# Altium PCB cyberlamp.PcbDoc (part 2 of 2)
Units mm, origin at the board's own origin, x right, y up, seen from the top; angles counter-clockwise.
Board outline 100 x 80 mm, 2 copper layers (Top Layer, Bottom Layer), stack 1.371 mm thick; 155 components, 110 nets, 527 pads, 165 vias.
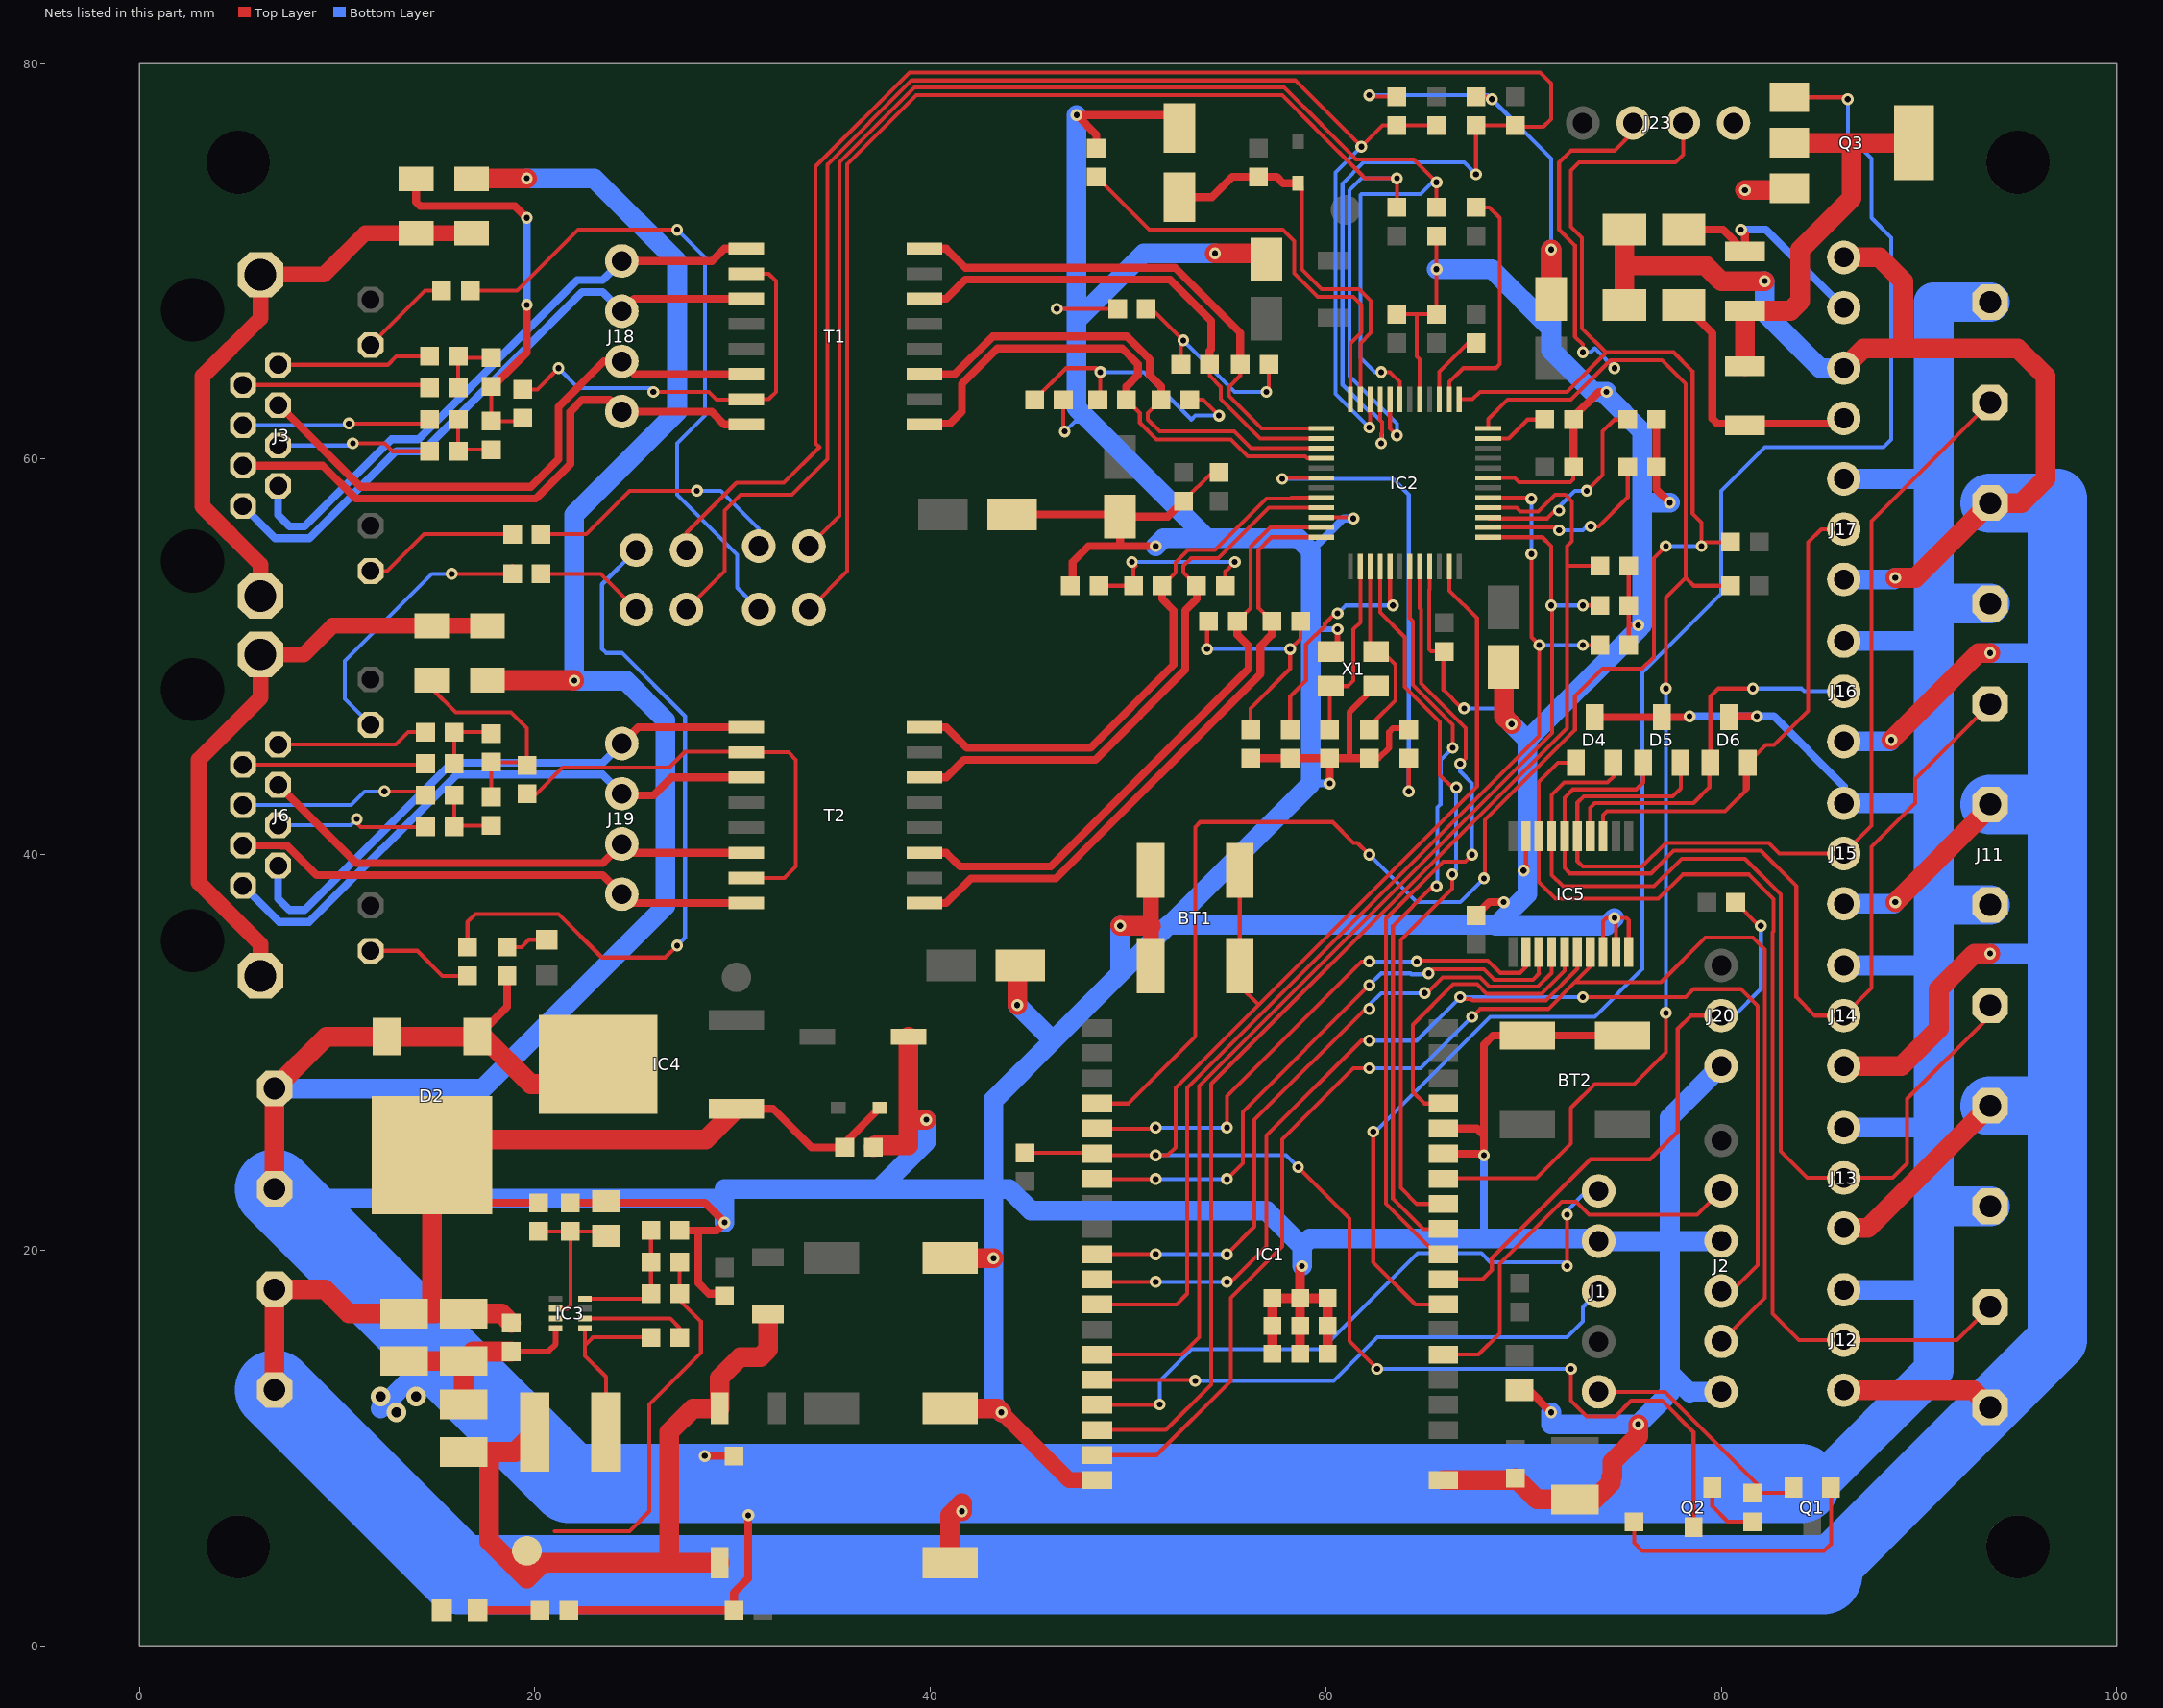
[diagram p2: the nets of this part, all layers, seen from the top]

## Via types
v1: diameter 0.6, hole 0.3, Top Layer to Bottom Layer, 162 vias
v2: diameter 1, hole 0.5, Top Layer to Bottom Layer, 3 vias

## Nets (pads, with @x,y where several pads share a name; then routed paths per layer and width w, separated by ;. In a path a pad name is that pad's centre, name@x,y a point inside that pad or via, vN(x,y) a via of type N, cw(c..) or ccw(c..) an arc to the next point about the centre after c; other vN are vias at no path point) (continued)
GND: BT1.3 BT1.4 BT2.1 BT2.2 C1.2 C2.2 C3.2 C4.2 C5.- C6.2 C7.2 C8.- C9.2 C10.- C11.2 C12.2 C13.- C14.2 C15.1 C16.1 C17.- C18.2 C19.2 C20.- C22.1 C23.2 C24.2 C25.- C27.1 C28.- C29.2 C31.- C32.2 C33.2 C34.2 C36.2 C37.2 C38.- C39.2 C40.2 C41.1 C42.2 D2.2 D4.3 D5.3 D6.3 IC1.1 IC1.14 IC1.15 IC1.38 IC1.39 IC2.10 IC2.21 IC2.31 IC2.41 IC3.4 IC4.3 IC5.8 IC5.9 IC5.10 IC5.19 J1.2 J2.3 J2.6 J10.1 J10.2 J11.3 J11.6 J11.9 J11.12 J12.1 J13.1 J14.1 J15.1 J16.1 J17.1 J20.3 J23.4 Q3.3 R2.1 R4.1 R5.1 R6.1 R9.1 R10.1 R11.1 R12.1 R20.1 R21.1 R23.2 R38.2 R52.1 R55.1 R56.1 R57.1 X1.2 X1.4 | length 843.3
  Top Layer w0.2: v1(46.4,67.6) C19.2@49.475,67.6 ; C18.2@46.725,63 46.725,61.475 v1(46.8,61.4) ; C9.2@52.8,57.875 54.25,59.325 C14.2@54.6,59.325 ; IC2.10@59.775,57.05 61.35,57.05 v1(61.4,57) ; v1(62.2,78.4) 62.275,78.325 R4.1@63.6,78.325 ; C12.2@63.6,67.325 C6.2@65.6,67.325 v1(65.6,69.6) R6.1@65.6,71.275 ; 64.6,67.2 64.6,65.2 64.75,65.05 IC2.41@64.75,63.025 ; IC2.21@65.25,54.575 65.25,53.425 65.225,53.4 65.225,50.375 65.325,50.275 C7.2@66,50.275 65.95,50.225 65.95,48.331 66.881,47.4 v1(67,47.4) ; R2.1@67.6,78.325 68.275,78.325 v1(68.4,78.2) ; IC2.31@68.225,59.05 69.55,59.05 69.775,58.825 72.375,58.825 72.525,58.975 C11.2@72.525,59.6 ; v1(70,39.2) 70.2,39.4 70.125,39.475 IC5.19@70.125,40.925 ; IC5.8@74.025,35.075 74.025,36.625 74.2,36.8 v1(74.6,36.8) ; IC5.9@74.675,35.075 74.675,36.725 v1(74.6,36.8) ; IC5.10@75.325,35.075 75.325,36.675 75.2,36.8 v1(74.6,36.8) ; R9.1@75.325,50.6 75.325,51.6 ; R10.1@75.325,54.6 R5.1@75.325,52.6 75.325,51.6 ; v1(75.8,51.6) 75.325,51.6
  Top Layer w0.3: C34.2@18.8,14.875 20.675,14.875 21.06,15.26 IC3.4@21.06,16.05 ; X1.2@60.25,50.275 60.6,50.625 v1(60.6,51.4) ; 61.2,44.875 61.2,47.2 62.525,48.525 X1.4@62.55,48.525 ; C15.1@62.2,44.875 62.675,44.875 63.2,45.4 63.2,46.2 63.4,46.4 64.125,46.4 R20.1@64.2,46.325
  Top Layer w0.4: D2.2@17.09,30.8 18.6,32.31 R56.1@18.6,33.875 ; R57.1@21.725,1.8 C39.2@30.075,1.8 30.075,2.675 30.8,3.4 v1(30.8,6.6) ; R55.1@21.8,22.4 28.6,22.4 v1(29.6,21.4) 29.2,21 28.262,21 ; R52.1@27.325,21 28.262,21 ; v1(28.6,9.6) C29.2@30.075,9.6 ; C37.2@29.6,17.675 29.475,17.8 28.8,17.8 28.262,18.338 28.262,21 ; C20.-@44.15,57.2 49.9,57.2 C8.-@50,57.1 ; C24.2@47.075,53.6 47.2,53.725 47.2,54.8 48,55.6 49.6,55.6 ; R23.2@48.4,75.725 48.4,76.4 v1(47.4,77.4) 51.95,77.4 C17.-@52.6,76.75 ; v1(51.4,55.6) 49.6,55.6 ; C9.2@52.8,57.875 52.025,57.1 C8.-@50,57.1 ; C23.2@56.2,44.875 C16.1@60.2,44.875 ; v1(60.2,43.6) C16.1@60.2,44.875 ; C15.1@62.2,44.875 61.2,44.875 C16.1@60.2,44.875 ; IC1.14@65.95,24.88 67.92,24.88 v1(68,24.8) 68,25.8 ; IC1.15@65.95,26.15 67.65,26.15 68,25.8 ; C42.2@67.6,36.925 68.275,37.6 v1(69,37.6) ; C3.2@69.8,12.925 70.275,12.925 v1(71.4,11.8) ; C11.2@72.525,59.6 R21.1@72.525,62 72.525,62.125 73.8,63.4 v1(74.2,63.4) ; D4.3@73.6,46.95 D5.3@77,46.95 78.35,46.95 v1(78.4,47) ; BT2.1@75.007,30.85 BT2.2@70.192,30.85 68.45,30.85 68,30.4 68,25.8 ; R11.1@76.725,62 R12.1@76.725,59.6 76.725,58.475 v1(77.4,57.8) ; D6.3@80.4,46.95 80.45,47 v1(81.8,47) ; 49.6,55.6 C8.-@49.6,57.1 C8.-@50,57.1
  Top Layer w0.5: IC1.39@57.3,14.77 IC1.39@57.3,16.17 IC1.39@57.3,17.57 IC1.39@58.7,17.57 ; IC1.39@58.7,14.77 IC1.39@58.7,16.17 IC1.39@58.7,17.57 ; v1(58.8,19.2) 58.7,19.1 IC1.39@58.7,17.57 ; IC1.39@60.1,14.77 IC1.39@60.1,16.17 IC1.39@60.1,17.57 IC1.39@58.7,17.57
  Top Layer w0.8: v1(43.6,11.8) 47.03,8.37 IC1.38@48.45,8.37 ; BT1.3@51.15,34.393 51.15,36.4 BT1.4@51.15,39.208
  Top Layer w1: J10.2@6.84,23.1 J10.1@6.84,28.18 9.46,30.8 D2.2@12.51,30.8 D2.2@17.09,30.8 17.4,30.8 19.8,28.4 IC4.3@23.2,28.4 ; C32.2@13.4,14.4 C33.2@16.4,14.4 ; C36.2@16.4,12.2 C33.2@16.4,14.4 ; C22.1@16.8,74.175 16.825,74.2 v1(19.6,74.2) ; C27.1@17.6,48.825 21.975,48.825 v1(22,48.8) ; C34.2@18.8,14.875 16.875,14.875 C33.2@16.4,14.4 ; C41.1@37.125,25.2 37.225,25.3 38.9,25.3 38.9,26.8 ; C40.2@38.9,30.8 38.9,26.8 ; v1(39.8,26.6) 39.1,26.6 38.9,26.8 ; C38.-@41,4.2 41,6.6 41.6,7.2 v1(41.6,6.8) ; C28.-@41,12 43.4,12 v1(43.6,11.8) ; C31.-@41,19.6 v1(43.2,19.6) ; v1(44.4,32.4) 44.4,34.25 C25.-@44.55,34.4 ; v1(49.6,36.4) 51.15,36.4 ; v1(54.4,70.4) 56.7,70.4 C13.-@57,70.1 ; IC1.1@65.95,8.37 69.495,8.37 C2.2@69.6,8.475 70.675,7.4 C1.2@72.6,7.4 73.6,7.4 74.425,8.225 74.425,8.49 74.5,8.565 74.5,9.3 75.8,10.6 v1(75.8,11.2) ; C5.-@69,49.5 69,47 v1(69.4,46.6) ; C10.-@71.4,68.1 v1(71.4,70.6) ; v1(81.2,73.6) 83.35,73.6 Q3.3@83.45,73.7
  Bottom Layer w0.2: v1(46.4,67.6) 47.4,67.6 ; v1(46.8,61.4) 47.3,61.9 48.1,61.9 ; v1(62.2,78.4) 68.2,78.4 v1(68.4,78.2) 71.4,75.2 v1(71.4,70.6) ; v1(67,47.4) 68.6,47.4 v1(69.4,46.6)
  Bottom Layer w0.3: 59.45,51.4 v1(60.6,51.4)
  Bottom Layer w0.4: 59.2,43.6 v1(60.2,43.6) ; 59.25,55.35 60.9,57 v1(61.4,57) ; 68,20.6 v1(68,24.8) ; v1(78.4,47) v1(81.8,47) 82.661,47 86.2,43.461 J15.1@86.2,42.6
  Bottom Layer w1: J10.2@6.84,23.1 7.34,22.6 29.6,22.6 v1(29.6,21.4) ; J10.1@6.84,28.18 17.38,28.18 26.6,37.4 26.6,46.8 24.6,48.8 v1(22,48.8) 22,57.2 27.2,62.4 27.2,70 23,74.2 v1(19.6,74.2) ; 12.2,12 14.97,14.77 14.97,14.97 ; 29.6,23.1 37.4,23.1 ; v1(39.8,26.6) 39.8,25.5 37.4,23.1 ; v1(43.6,11.8) 43.2,12.2 v1(43.2,19.6) 43.2,23.1 ; v1(44.4,32.4) 46.1,30.7 46.3,30.7 ; v1(47.4,77.4) 47.4,67.6 47.4,67 ; v1(49.6,36.4) 49.6,34 ; v1(51.4,55.6) 51.8,56 54,56 ; v1(54.4,70.4) 50.8,70.4 47.4,67 ; v1(58.8,19.2) 58.8,20.2 ; 59.25,51.2 59.25,43.65 59.2,43.6 59.2,43.537 52.063,36.4 52,36.4 ; 59.25,51.4 59.25,55.35 58.6,56 54,56 ; v1(65.6,69.6) 68.4,69.6 71.4,66.6 ; v1(69.4,46.6) 70.2,45.8 ; v1(71.4,11.8) 71.4,11.2 73.8,11.2 v1(75.8,11.2) 77.4,12.8 77.4,13.8 ; v1(71.4,70.6) 71.4,66.6 ; v1(74.6,36.8) 74.2,36.4 68.6,36.4 ; v1@75.9,51.5 70.2,45.8 ; v1@76,51.6 76,57.8 ; v1(77.4,57.8) 76,57.8 ; J2.6@80,12.85 78.45,12.85 78.4,12.8 77.4,13.8 ; J2.3@80,20.47 79.99,20.46 77.4,20.46 ; J20.3@80,29.32 77.4,26.72 77.4,20.46 ; J12.1@86.2,18 90.74,18 ; J13.1@86.2,26.2 90.74,26.2 ; J14.1@86.2,34.4 90.74,34.4 ; J15.1@86.2,42.6 90.74,42.6 ; J16.1@86.2,50.8 90.54,50.8 90.74,50.6 ; J17.1@86.2,59 90.54,59 90.74,59.2 ; 37.4,23.1 43.2,23.1 ; 43.2,23.1 44,23.1 45.1,22 57,22 58.8,20.2 ; 43.2,23.1 43.2,27.6 46.3,30.7 ; 46.3,30.7 49.6,34 ; 47.4,67 47.4,62.6 48.1,61.9 54,56 ; 49.6,34 52,36.4 ; 52,36.4 52.05,36.45 68.55,36.45 68.6,36.4 ; 58.8,20.2 59.2,20.6 68,20.6 73.66,20.6 J1.2@73.8,20.46 77.4,20.46 ; 68.6,36.4 70.2,38 70.2,45.8 ; 71.4,66.6 71.4,65.515 73.515,63.4 v1(74.2,63.4) 74.2,63.2 76,61.4 76,57.8 ; 77.4,13.8 77.4,20.46
  Bottom Layer w2: 85,8.2 90.74,13.94 90.74,18 90.74,22.22 ; J11.3@93.6,22.22 90.74,22.22 ; J11.6@93.6,37.46 90.74,37.46 ; J11.9@93.6,52.7 90.74,52.7 ; J11.12@93.6,67.94 90.74,67.94 90.74,59.2 90.74,52.7 ; 90.74,22.22 90.74,26.2 90.74,34.4 90.74,37.46 ; 90.74,37.46 90.74,42.6 90.74,50.6 90.74,52.7
  Bottom Layer w4: J10.2@6.84,23.1 14.97,14.97 21.74,8.2 84,8.2
  other v2: 13,11.8 12.2,12.6 14,12.6
NetBT1_1: BT1.1 BT1.2 IC1.25 IC2.23 Q2.3 R13.1 | length 94.3
  Top Layer w0.2: R13.1@44.8,24.925 48.405,24.925 IC1.25@48.45,24.88 48.53,24.8 v1(51.4,24.8) 52,24.8 52.4,25.2 52.4,28.2 56.6,32.4 ; BT1.2@55.65,39.208 BT1.1@55.65,34.393 55.65,33.35 56.6,32.4 ; v1(58.6,24.2) 61.2,21.6 61.2,15.4 v1(62.6,14) ; IC2.23@66.25,54.575 66.25,53.35 67.65,51.95 67.65,43.45 56.6,32.4 ; v1(72.4,14) 72.4,12.4 73.2,11.6 74.644,11.6 75.444,12.4 77,12.4 78.6,10.8 Q2.3@78.6,6
  Bottom Layer w0.2: v1(51.4,24.8) 58,24.8 v1(58.6,24.2) ; v1(62.6,14) v1(72.4,14)
NetC4_1: C4.1 IC3.2 R54.1 R55.2 | length 8.1
  Top Layer w0.2: R54.1@20.2,20.95 23.3,20.95 C4.1@23.6,20.65 ; IC3.2@21.06,17.05 21.65,17.05 21.8,17.2 R55.2@21.8,20.95
NetC15_2: C15.2 IC2.15 X1.1 | length 8.9
  Top Layer w0.2: IC2.15@62.25,54.575 62.25,50.575 X1.1@62.55,50.275 62.85,50.275 63.525,49.6 63.525,47.8 C15.2@62.525,46.8
NetC16_2: C16.2 IC2.14 X1.3 | length 9.4
  Top Layer w0.2: C16.2@60.2,46.325 60.2,48.475 X1.3@60.25,48.525 61.125,48.525 61.4,48.8 61.4,51.4 61.75,51.75 IC2.14@61.75,54.575
NetC17_+: C17.+ D1.2 IC2.47 R22.1 | length 20.3
  Top Layer w0.2: D1.2@58.6,73.945 58.8,73.745 58.8,69.6 59.8,68.6 61.695,68.6 62.275,68.02 62.275,66.38 61.75,65.855 IC2.47@61.75,63.025
  Top Layer w0.4: C17.+@52.6,73.25 54.25,73.25 55.275,74.275 R22.1@56.6,74.275 57.525,74.275 57.855,73.945 D1.2@58.6,73.945
NetC18_1: C18.1 R24.1 R25.1 | length 14.4
  Top Layer w0.2: C18.1@45.275,63 46.875,64.6 48.4,64.6 v1(48.6,64.4) 48.6,63.125 R24.1@48.475,63 ; R25.1@53.125,63 53.8,63 v1(54.6,62.2)
  Bottom Layer w0.2: v1(48.6,64.4) 50.8,64.4 53.2,62 53.4,62.2 v1(54.6,62.2)
NetC19_1: C19.1 R26.1 R31.1 | length 10.5
  Top Layer w0.2: C19.1@50.925,67.6 51.2,67.6 v1(52.8,66) 52.675,65.875 R26.1@52.675,64.8 ; v1(57,63.4) 57.125,63.525 R31.1@57.125,64.8
  Bottom Layer w0.2: v1(52.8,66) 55.4,63.4 v1(57,63.4)
NetC21_1: C21.1 C22.2 J3.13 | length 29.8
  Top Layer w0.8: J3.13@6.13,53.075 6.13,54.67 3.2,57.6 3.2,64.2 6.13,67.13 J3.13@6.13,69.325 9.325,69.325 11.425,71.425 C22.2@16.4,71.425
NetC21_2: C21.2 R27.2 R29.1 R33.1 | length 19.8
  Top Layer w0.2: R33.1@17.8,63.675 R29.1@17.8,61.925 19.25,61.925 R27.2@19.4,62.075
  Top Layer w0.4: C21.2@14,74.175 14,73 14.2,72.8 19,72.8 v1(19.6,72.2) ; R33.1@17.8,63.675 17.866,63.675 19.591,65.4 19.6,65.4 v1(19.6,67.8)
  Bottom Layer w0.4: v1(19.6,67.8) v1(19.6,72.2)
NetC23_1: C23.1 R37.1 R39.1 | length 12.2
  Top Layer w0.2: v1(54,50.4) 54,51.725 R39.1@54.075,51.8 ; C23.1@56.2,46.325 56.2,47.4 58.2,49.4 v1(58.2,50.4) 58.725,50.925 R37.1@58.725,51.8
  Bottom Layer w0.2: v1(54,50.4) v1(58.2,50.4)
NetC24_1: C24.1 R40.1 R45.1 | length 9.7
  Top Layer w0.2: C24.1@48.525,53.6 R45.1@50.275,53.6 50.275,54.475 50.4,54.6 v1(50.2,54.8) ; R40.1@54.925,53.6 54.925,54.325 v1(55.4,54.8)
  Bottom Layer w0.2: v1(50.2,54.8) v1(55.4,54.8)
NetC26_1: C26.1 C27.2 J6.13 | length 30.9
  Top Layer w0.8: J6.13@6.13,33.875 6.13,35.47 3,38.6 3,44.8 6.13,47.93 J6.13@6.13,50.125 8.325,50.125 9.775,51.575 C27.2@17.6,51.575
NetC26_2: C26.2 R41.2 R43.1 R47.1 | length 11.5
  Top Layer w0.2: C26.2@14.8,48.825 14.8,48.4 16,47.2 18.8,47.2 19.6,46.4 R41.2@19.6,44.525 19.45,44.675 R47.1@17.8,44.675 R43.1@17.8,42.925
NetC30_1: C30.1 IC3.6 | length 5.5
  Top Layer w0.2: IC3.6@22.54,16.55 26.85,16.55 27.325,16.075 C30.1@27.325,15.6
NetC30_2: C30.2 IC3.5 L1.1 | length 9.2
  Top Layer w0.2: IC3.5@22.54,16.05 22.54,15.2 ; L1.1@23.6,10.8 23.6,13.6 22.54,14.66 22.54,15.2 ; C30.2@25.875,15.6 22.94,15.6 22.54,15.2
NetC35_1: C35.1 C36.1 D8.2 FB2.1 FB3.1 FB4.1 L1.2 R51.2 TP2.1 | length 55.3
  Top Layer w0.2: 21,5.8 24.8,5.8 25.8,6.8 25.8,12.2 28.4,14.8 28.4,16.4 27.325,17.475 R51.2@27.325,17.8 C35.1@27.325,19.4
  Top Layer w1: L1.2@20,10.8 19,9.8 17.7,9.8 17.7,5.3 19.6,3.4 20.4,4.2 26.8,4.2 ; FB4.1@29.35,4.2 26.8,4.2 ; FB3.1@31.8,16.75 31.8,15 31.4,14.6 30.4,14.6 29.35,13.55 FB2.1@29.35,12 28,12 26.8,10.8 26.8,4.2
NetC35_2: C35.2 IC3.8 R51.1 R52.2 | length 6.6
  Top Layer w0.2: IC3.8@22.54,17.55 25.625,17.55 R51.1@25.875,17.8 R52.2@25.875,21
NetC43_-: C43.- J22.2 L3.2 | length 11.6
  Top Layer w0.4: C43.-@78.1,71.6 80.1,71.6 L3.2@81.2,70.5 81.2,71.4 v1(81,71.6)
  Bottom Layer w0.4: v1(81,71.6) 82.26,71.6 J22.2@86.2,67.66
NetC44_-: C44.- J21.2 L2.2 | length 13.4
  Top Layer w0.4: C44.-@78.1,67.8 79.55,66.35 79.55,62.05 79.8,61.8 L2.2@81.1,61.8 ; L2.2@81.2,61.7 L2.2@81.1,61.8 ; J21.2@86.2,62.06 85.94,61.8 L2.2@81.1,61.8
NetD4_1: D4.1 IC5.18 J11.2 J12.2 | length 53.8
  Top Layer w0.2: D4.1@72.65,44.65 71.745,44.65 70.775,43.68 IC5.18@70.775,40.925 70.775,38.625 71.625,37.775 76.825,37.775 78.05,39 81.4,39 82.65,37.75 82.65,36.131 82.6,36.081 82.6,16.8 83.94,15.46 J12.2@86.2,15.46 91.92,15.46 J11.2@93.6,17.14
NetD4_2: D4.2 IC5.17 J11.5 J13.2 | length 51.4
  Top Layer w0.2: D4.2@74.55,44.65 74.55,43.95 74.25,43.65 72.05,43.65 71.425,43.025 IC5.17@71.425,40.925 71.425,38.975 72,38.4 76.6,38.4 78,39.8 81.2,39.8 83,38 83,25 84.34,23.66 J13.2@86.2,23.66 88.66,23.66 89.4,24.4 89.4,27.66 93.6,31.86 J11.5@93.6,32.38
NetD5_1: D5.1 IC5.16 J11.8 J14.2 | length 49.1
  Top Layer w0.2: D5.1@76.05,44.65 76.05,43.65 75.7,43.3 72.5,43.3 72.075,42.875 IC5.16@72.075,40.925 72.075,39.325 72.35,39.05 76.45,39.05 77.6,40.2 82,40.2 83.8,38.4 83.8,32.8 84.74,31.86 J14.2@86.2,31.86 87.6,33.26 87.6,40.4 89.8,42.6 89.8,43.82 J11.8@93.6,47.62
NetD5_2: D5.2 IC5.15 J11.11 J15.2 | length 50
  Top Layer w0.2: D5.2@77.95,44.65 77.95,43.35 77.55,42.95 73.05,42.95 72.725,42.625 IC5.15@72.725,40.925 72.725,39.675 73,39.4 76,39.4 77.2,40.6 82.4,40.6 82.94,40.06 J15.2@86.2,40.06 87.6,41.46 87.6,56.86 J11.11@93.6,62.86
NetD6_1: D6.1 IC5.14 J16.2 | length 19.5
  Top Layer w0.2: IC5.14@73.375,40.925 73.375,42.375 73.6,42.6 78.6,42.6 79.4,43.4 79.4,44.6 D6.1@79.45,44.65 79.45,48 79.85,48.4 v1(81.6,48.4)
  Bottom Layer w0.2: v1(81.6,48.4) 84.06,48.4 84.2,48.26 J16.2@86.2,48.26
NetD6_2: D6.2 IC5.13 J17.2 | length 26.5
  Top Layer w0.2: IC5.13@74.025,40.925 74.025,42 74.225,42.2 80.2,42.2 81.35,43.35 D6.2@81.35,44.65 ; 81.2,43.2 81.2,44.5 D6.2@81.35,44.65 ; J17.2@86.2,56.46 85.06,56.46 84.4,55.8 84.4,47.281 82.669,45.55 82.25,45.55 D6.2@81.35,44.65
NetD7_1: D7.1 R56.2 | length 2.2
  Top Layer w0.2: R56.2@18.6,35.325 19.325,35.325 19.7,35.7 D7.1@20.6,35.7
NetD8_1: D8.1 R57.2 | length 3.2
  Top Layer w0.4: D8.1@17.1,1.8 R57.2@20.275,1.8
NetIC1_6: IC1.6 J2.2 | length 20.1
  Top Layer w0.2: IC1.6@65.95,14.72 67.72,14.72 68.8,15.8 68.8,19.319 71.931,22.45 72.669,22.45 73.319,21.8 78.79,21.8 J2.2@80,23.01
NetIC1_8: IC1.8 Q3.1 | length 84.5
  Top Layer w0.2: v1(62.4,26) 62.4,19.4 64.54,17.26 IC1.8@65.95,17.26 ; Q3.1@83.45,78.3 v1@86.3,78.3
  Bottom Layer w0.2: v1(62.4,26) 62.519,26 68.319,31.8 73.6,31.8 76,34.2 76,49.2 80,53.2 80,58.4 82.2,60.6 88.2,60.6 88.6,61 88.6,71.2 87.6,72.2 87.6,75.2 86.4,76.4 v1(86.4,78.2)
NetIC1_9: IC1.9 J20.2 R53.1 | length 30.5
  Top Layer w0.2: IC1.9@65.95,18.53 67.93,18.53 68.4,19 68.4,19.614 73.386,24.6 76.4,24.6 77.8,26 77.8,31.2 78.46,31.86 J20.2@80,31.86 ; R53.1@80.725,37.6 81.925,36.4 v1(82,36.4)
  Bottom Layer w0.2: J20.2@80,31.86 80.66,31.86 82,33.2 v1(82,36.4)
NetIC1_10: IC1.10 IC2.20 | length 40
  Top Layer w0.2: IC2.20@64.75,54.575 64.75,52.475 64.825,52.4 64.825,48.656 67.075,46.406 67.075,44.875 v1(66.8,44.6) ; IC1.10@65.95,19.8 65.596,19.8 63.05,22.346 63.05,36.769 65.931,39.65 67.05,39.65 v1(67.4,40)
  Bottom Layer w0.2: v1(66.8,44.6) 66.8,44.2 67.4,43.6 v1(67.4,40)
NetIC1_11: IC1.11 IC2.19 | length 37.4
  Top Layer w0.2: IC2.19@64.25,54.575 64.25,51.95 64.4,51.8 64.4,48.586 66.425,46.561 v1(66.425,45.4) ; v1(65.6,38.4) 65.4,38.4 63.4,36.4 63.4,22.6 64.93,21.07 IC1.11@65.95,21.07
  Bottom Layer w0.2: v1(65.6,38.4) 65.65,38.45 65.65,42.387 65.8,42.537 65.8,44.775 v1(66.425,45.4)
NetIC1_12: IC1.12 IC2.16 | length 36.8
  Top Layer w0.2: IC2.16@62.75,54.575 62.75,52.25 64,51 64,48.491 65.775,46.716 65.775,45.726 65.775,45.474 65.775,44.025 66.4,43.4 v1(66.6,43.4) ; IC1.12@65.95,22.34 64.609,22.34 63.8,23.149 63.8,35.681 66.4,38.281 v1(66.4,39)
  Bottom Layer w0.2: v1(66.4,39) 66.6,39.2 v1(66.6,43.4)
NetIC1_16: IC1.16 IC5.5 | length 15.3
  Top Layer w0.2: IC1.16@65.95,27.42 64.98,27.42 64.4,28 64.4,31.4 66.45,33.45 67.655,33.45 68.13,32.975 70.925,32.975 72.075,34.125 IC5.5@72.075,35.075
NetIC1_24: IC1.24 IC5.2 | length 27.3
  Top Layer w0.2: IC1.24@48.45,26.15 51.35,26.15 v1(51.4,26.2) ; v1(55,26.2) 55,27.8 61.8,34.6 v1(62.2,34.6) ; v1(64.6,34.6) 64.65,34.65 68.2,34.65 68.825,34.025 69.824,34.025 70.125,34.326 IC5.2@70.125,35.075
  Bottom Layer w0.2: v1(51.4,26.2) v1(55,26.2) ; v1(62.2,34.6) v1(64.6,34.6)
NetIC1_26: IC1.26 IC5.3 | length 29.7
  Top Layer w0.2: IC1.26@48.45,23.61 48.46,23.6 v1(51.4,23.6) ; v1(55,23.6) 55.8,24.4 55.8,27 v1(62.2,33.4) ; v1(65.2,34) 65.4,34.2 68,34.2 68.525,33.675 70.475,33.675 70.8,34 70.775,34.025 IC5.3@70.775,35.075
  Bottom Layer w0.2: v1(51.4,23.6) v1(55,23.6) ; v1(62.2,33.4) 62.8,34 64.281,34 64.331,33.95 65.15,33.95 v1(65.2,34)
NetIC1_29: IC1.29 IC5.4 | length 33.6
  Top Layer w0.2: IC1.29@48.45,19.8 v1(51.4,19.8) ; v1(55,19.8) 56.4,21.2 56.4,26.6 62,32.2 v1(62.2,32.2) ; v1(65,33) 65.119,33 65.919,33.8 67.8,33.8 68.275,33.325 70.725,33.325 71.425,34.025 IC5.4@71.425,35.075 IC5.4@71.4,35.05
  Bottom Layer w0.2: v1(51.4,19.8) v1(55,19.8) ; v1(62.2,32.2) 62.2,32.4 62.8,33 v1(65,33)
NetIC1_30: IC1.30 IC5.6 J2.4 | length 66.2
  Top Layer w0.2: IC1.30@48.45,18.53 48.58,18.4 v1(51.4,18.4) ; v1(55,18.4) 55.2,18.4 57,20.2 57,25.8 61.8,30.6 v1(62.2,30.6) ; v1(66.8,32.8) 66.9,32.7 67.353,32.7 67.428,32.625 71.125,32.625 72.725,34.225 IC5.6@72.725,35.075 ; v1(73,32.8) 78.2,32.8 78.6,33.2 81,33.2 81.85,32.35 81.85,19.25 80.53,17.93 J2.4@80,17.93
  Bottom Layer w0.2: v1(51.4,18.4) v1(55,18.4) ; v1(62.2,30.6) 64.6,30.6 v1(66.8,32.8) v1(73,32.8)
NetIC1_34: IC1.34 J1.3 | length 27.7
  Top Layer w0.2: IC1.34@48.45,13.45 53.35,13.45 v1(53.4,13.4)
  Bottom Layer w0.2: v1(53.4,13.4) 60.4,13.4 62.6,15.6 72.2,15.6 73,16.4 73,17.12 J1.3@73.8,17.92
NetIC1_35: IC1.35 J1.1 | length 32.8
  Top Layer w0.2: IC1.35@48.45,12.18 51.58,12.18 v1(51.6,12.2) ; v1(72.2,19.2) v1(72.2,21.8)
  Bottom Layer w0.2: v1(51.6,12.2) 51.6,13.4 53.2,15 59.8,15 64.65,19.85 67.869,19.85 68.319,19.4 72.2,19.4 v1(72.2,19.2) ; v1(72.2,21.8) 72.2,22 73.2,23 J1.1@73.8,23
NetIC1_37: IC1.37 IC5.7 J2.5 | length 73.1
  Top Layer w0.2: IC1.37@48.45,9.64 51.44,9.64 55.2,13.4 55.2,17.6 57.8,20.2 57.8,25.6 61.4,29.2 v1(62.2,29.2) ; v1(67.4,31.8) 67.8,32.2 71.25,32.2 72.6,33.55 ; IC5.7@73.4,35.05 IC5.7@73.375,35.075 73.375,34.325 72.6,33.55 ; J2.5@80,15.39 82.2,17.59 82.2,35.2 81.6,35.8 79.2,35.8 76.95,33.55 72.6,33.55
  Bottom Layer w0.2: v1(62.2,29.2) 64.8,29.2 v1(67.4,31.8)
NetIC2_6: IC2.6 R20.2 | length 25.4
  Top Layer w0.2: v1(57.8,59) 57.85,59.05 IC2.6@59.775,59.05 ; v1(64.2,43.2) R20.2@64.2,44.875
  Bottom Layer w0.2: v1(57.8,59) 63.4,59 64.2,58.2 v1(64.2,43.2)
NetIC2_35: IC2.35 R21.2 | length 3.2
  Top Layer w0.2: IC2.35@68.225,61.05 69.25,61.05 70.2,62 R21.2@71.075,62
NetIC2_39: IC2.39 R19.2 | length 3.5
  Top Layer w0.2: IC2.39@65.75,63.025 65.75,64.425 R19.2@67.2,65.875
NetIC2_48: IC2.48 R23.1 | length 22
  Top Layer w0.2: R23.1@48.4,74.275 51.075,71.6 57.824,71.6 58.4,71.024 58.4,69.4 59.6,68.2 61.4,68.2 61.8,67.8 61.8,66.4 61.25,65.85 IC2.48@61.25,63.025
NetJ3_4: J3.4 R28.2 | length 7.9
  Top Layer w0.2: v1(10.8,60.8) 12.4,60.8 12.8,60.4 R28.2@14.675,60.4
  Bottom Layer w0.2: J3.4@7.02,60.69 10.69,60.69 v1(10.8,60.8)
NetJ3_5: J3.5 R30.2 | length 9.6
  Top Layer w0.2: v1(10.6,61.8) 14.475,61.8 R30.2@14.675,62
  Bottom Layer w0.2: J3.5@5.24,61.71 10.51,61.71 v1(10.6,61.8)
NetJ3_7: J3.7 R32.2 | length 9.5
  Top Layer w0.2: J3.7@5.24,63.75 14.525,63.75 R32.2@14.675,63.6
NetJ3_8: J3.8 R34.2 | length 7.8
  Top Layer w0.2: J3.8@7.02,64.77 12.57,64.77 13,65.2 R34.2@14.675,65.2
NetJ3_9: J3.9 R35.2 | length 7.9
  Top Layer w0.2: J3.9@11.7,54.34 12.54,54.34 14.4,56.2 R35.2@18.875,56.2
NetJ3_11: J3.11 R36.2 | length 4.7
  Top Layer w0.2: J3.11@11.7,65.77 14.45,68.52 R36.2@15.297,68.52
NetJ4_1: J4.1 R35.1 | length 13.6
  Top Layer w0.2: R35.1@20.325,56.2 22.6,56.2 24.8,58.4 v1(28.2,58.4)
  Bottom Layer w0.2: v1(28.2,58.4) 29.4,58.4 31.33,56.47 J4.1@31.33,55.6
NetJ5_1: J5.1 R36.1 | length 33.8
  Top Layer w0.2: R36.1@16.747,68.52 19.12,68.52 22.2,71.6 v1(27.2,71.6)
  Bottom Layer w0.2: v1(27.2,71.6) 28.6,70.2 28.6,62.2 27.2,60.8 27.2,58.2 30.23,55.17 30.23,53.5 J5.1@31.33,52.4
NetJ6_4: J6.4 R42.2 | length 7.9
  Top Layer w0.2: v1(11,41.8) 11,41.6 11.2,41.4 R42.2@14.475,41.4
  Bottom Layer w0.2: J6.4@7.02,41.49 10.69,41.49 v1(11,41.8)
NetJ6_5: J6.5 R44.2 | length 9.6
  Top Layer w0.2: v1(12.4,43.2) 14.275,43.2 R44.2@14.475,43
  Bottom Layer w0.2: J6.5@5.24,42.51 10.71,42.51 11.4,43.2 v1(12.4,43.2)
NetJ6_7: J6.7 R46.2 | length 9.3
  Top Layer w0.2: J6.7@5.24,44.55 14.425,44.55 R46.2@14.475,44.6
NetJ6_8: J6.8 R48.2 | length 7.7
  Top Layer w0.2: J6.8@7.02,45.57 12.97,45.57 13.6,46.2 R48.2@14.475,46.2
NetJ6_9: J6.9 R49.2 | length 5.4
  Top Layer w0.2: J6.9@11.7,35.14 14.06,35.14 15.325,33.875 R49.2@16.6,33.875
NetJ6_11: J6.11 R50.2 | length 14.2
  Top Layer w0.2: v1(15.8,54.2) 18.475,54.2 R50.2@18.875,54.6
  Bottom Layer w0.2: J6.11@11.7,46.57 10.4,47.87 10.4,49.8 14.8,54.2 v1(15.8,54.2)
NetJ7_1: J7.1 R49.1 | length 36.3
  Top Layer w0.2: R49.1@16.6,35.325 16.6,36.6 17,37 21.2,37 23.4,34.8 26.6,34.8 v1(27.2,35.4)
  Bottom Layer w0.2: J7.1@25.13,55.4 23.4,53.67 23.4,50.4 23.6,50.2 24.4,50.2 27.6,47 27.6,35.8 v1(27.2,35.4)
NetJ8_1: J8.1 R50.1 | length 5.6
  Top Layer w0.2: R50.1@20.325,54.2 23.33,54.2 J8.1@25.13,52.4
NetL2_1: L2.1 L3.1 Q3.2 | length 21.2
  Top Layer w1: L2.1@81.2,64.7 L3.1@81.2,67.5 83.5,67.5 84,68 84,70.6 86.6,73.2 86.6,76 ; Q3.2@83.45,76 86.6,76 ; Q3.2@89.75,76 86.6,76
NetQ1_1: Q1.1 R17.1 | length 14.2
  Top Layer w0.2: R17.1@75.6,6.275 75.6,5.2 76,4.8 85.2,4.8 85.55,5.15 Q1.1@85.55,8
NetQ2_1: Q2.1 R18.1 | length 3.3
  Top Layer w0.2: Q2.1@79.55,8 79.55,7.05 80.325,6.275 R18.1@81.6,6.275
NetR27_1: R27.1 T1.10 T1.15 | length 21.7
  Top Layer w0.2: R27.1@19.4,63.525 20.125,63.525 v1(21.2,64.6) ; v1(26,63.4) 28.8,63.4 29.2,63 30.665,63 T1.15@30.69,63.025 31.825,63.025 32.2,63.4 32.2,69 31.825,69.375 T1.10@30.69,69.375
  Bottom Layer w0.2: v1(21.2,64.6) 22.2,63.6 26,63.6 26.2,63.4 v1(26,63.4)
NetR28_1: R28.1 R29.2 R30.1 | length 3.3
  Top Layer w0.2: R30.1@16.125,62 R28.1@16.125,60.4 16.2,60.475 R29.2@17.8,60.475
NetR32_1: R32.1 R33.2 R34.1 | length 3.3
  Top Layer w0.2: R32.1@16.125,63.6 R34.1@16.125,65.2 16.2,65.125 R33.2@17.8,65.125
NetR41_1: R41.1 T2.10 T2.15 | length 22.8
  Top Layer w0.2: R41.1@19.6,43.075 20.075,43.075 21.4,44.4 26.8,44.4 27.6,45.2 30.665,45.2 T2.10@30.69,45.175 32.825,45.175 33.2,44.8 33.2,39.4 32.625,38.825 T2.15@30.69,38.825
NetR42_1: R42.1 R43.2 R44.1 | length 3.5
  Top Layer w0.2: R44.1@15.925,43 R42.1@15.925,41.4 16,41.475 R43.2@17.8,41.475
NetR46_1: R46.1 R47.2 R48.1 | length 3.5
  Top Layer w0.2: R46.1@15.925,44.6 R48.1@15.925,46.2 17.725,46.2 R47.2@17.8,46.125
P1LED0: IC2.44 J5.2 R8.2 | length 73.8
  Top Layer w0.2: J5.2@33.87,52.4 35.8,54.33 35.8,74.905 39.295,78.4 57.8,78.4 59.456,76.744 59.456,76.73 61.8,74.386 61.986,74.2 v1(63.6,74.2) R8.2@63.6,72.725 ; IC2.44@63.25,63.025 63.25,61.55 v1(63.6,61.2)
  Bottom Layer w0.2: v1(63.6,61.2) 63.6,61.8 61.2,64.2 61.2,73.6 61.8,74.2 v1(63.6,74.2)
P1LED1: IC2.43 J4.2 R6.2 | length 70.8
  Top Layer w0.2: J4.2@33.87,55.6 35.4,57.13 35.4,75 39.2,78.8 57.895,78.8 59.806,76.889 59.806,76.875 61.531,75.15 64.45,75.15 v1(65.6,74) R6.2@65.6,72.725 ; v1(62.8,64.4) 63.25,64.4 63.75,63.9 IC2.43@63.75,63.025
  Bottom Layer w0.2: v1(62.8,64.4) 62.481,64.4 61.75,65.131 61.75,73.35 61.8,73.4 64.8,73.4 65.4,74 v1(65.6,74)
P2LED0: IC2.46 J8.2 R3.1 R4.2 | length 78.3
  Top Layer w0.2: J8.2@27.67,52.4 29.6,54.33 29.6,57.4 30.4,58.2 33,58.2 34.8,60 34.8,74.895 39.055,79.15 58.45,79.15 v1(61.8,75.8) 62.875,76.875 R3.1@65.6,76.875 ; v1(62.2,61.6) 62.25,61.65 IC2.46@62.25,63.025
  Bottom Layer w0.2: v1(61.8,75.8) 60.5,74.5 60.5,63.3 v1(62.2,61.6)
P2LED1: IC2.45 J7.2 R1.1 R2.2 | length 95.1
  Top Layer w0.2: J7.2@27.67,55.4 27.67,56.27 30.2,58.8 32.6,58.8 34.4,60.6 34.2,60.8 34.2,74.8 38.95,79.55 70.85,79.55 71.4,79 71.4,77.2 71,76.8 69.675,76.8 R1.1@69.6,76.875 R2.2@67.6,76.875 v1(67.6,74.4) ; IC2.45@62.75,63.025 62.75,61.969 62.85,61.869 62.85,61.331 62.8,61.281 v1(62.8,60.8)
  Bottom Layer w0.2: v1(62.8,60.8) 62.85,60.85 62.85,61.869 62.319,62.4 62.2,62.4 60.85,63.75 60.85,73.938 61.912,75 67,75 v1(67.6,74.4)
RTS: J1.5 Q1.2 R18.2 | length 12.5
  Top Layer w0.2: J1.5@73.8,12.84 77.16,12.84 81.85,8.15 R18.2@81.85,7.8 ; R18.2@81.6,7.725 83.375,7.725 Q1.2@83.65,8
RX1_N: IC2.1 R31.2 T1.8 | length 26.5
  Top Layer w0.2: R31.2@55.675,64.8 55.675,64.225 55.1,63.65 55.1,63.2 56.75,61.55 IC2.1@59.775,61.55
  Top Layer w0.4: T1.8@39.71,70.645 40.81,70.645 41.78,69.675 52.374,69.675 55.675,66.374 R31.2@55.675,64.8
RX1_P: IC2.2 R26.2 T1.6 | length 25.9
  Top Layer w0.2: R26.2@54.125,64.8 54.125,64.225 54.7,63.65 54.7,63.034 56.684,61.05 IC2.2@59.775,61.05
  Top Layer w0.4: T1.6@39.71,68.105 40.81,68.105 41.78,69.075 52.125,69.075 54.2,67 54.2,65.55 54.125,65.475 R26.2@54.125,64.8
RX2_N: IC2.8 R45.2 T2.8 | length 29.2
  Top Layer w0.2: R45.2@51.725,53.6 52.4,54.275 52.4,54.766 53.034,55.4 54.4,55.4 57,58 58.214,58 58.264,58.05 IC2.8@59.775,58.05
  Top Layer w0.4: T2.8@39.71,46.445 40.81,46.445 41.855,45.4 48.1,45.4 52.3,49.6 52.3,52.35 51.725,52.925 R45.2@51.725,53.6
RX2_P: IC2.9 R40.2 T2.6 | length 29.4
  Top Layer w0.2: R40.2@53.475,53.6 52.8,54.275 52.8,54.6 53.2,55 54.566,55 57.116,57.55 IC2.9@59.775,57.55
  Top Layer w0.4: T2.6@39.71,43.905 40.81,43.905 41.705,44.8 48.349,44.8 52.9,49.351 52.9,52.35 53.475,52.925 R40.2@53.475,53.6
SCL: IC1.13 IC2.36 J23.2 R15.1 | length 81.2
  Top Layer w0.2: IC1.13@65.95,23.61 65.99,23.65 70.65,23.65 72.4,25.4 72.4,27.2 73.6,28.4 75.6,28.4 77.2,30 v1(77.2,32) ; IC2.36@68.225,61.55 68.225,62.025 69.2,63 72.4,63 74.4,65 74.6,65 ; v1(73,65.4) 73,65.8 72.6,66.2 72.6,70.8 71.8,71.6 71.8,75 72.4,75.6 74.6,75.6 75.54,76.54 J23.2@75.54,77 ; v1(74.6,64.6) 74.6,65 ; v1(77.2,48.4) 77.2,53 78.2,54 ; R15.1@80.475,53.6 78.6,53.6 78.2,54 ; 74.6,65 77,65 78.2,63.8 78.2,54
  Bottom Layer w0.2: v1(73,65.4) 73.4,65.4 73.6,65.6 v1(74.6,64.6) ; v1(77.2,32) v1(77.2,48.4)
SDA: IC1.23 IC2.37 J23.3 R16.1 | length 98.8
  Top Layer w0.2: IC1.23@48.45,27.42 50.02,27.42 53.4,30.8 53.4,41.4 53.65,41.65 60.35,41.65 61.4,40.6 61.6,40.6 v1(62.2,40) ; IC2.37@66.75,63.025 67.425,63.025 67.8,63.4 72.2,63.4 74.2,65.4 ; v1(68,38.8) 68.05,38.85 68.05,41.75 72.6,46.3 72.6,48 74,49.4 76,49.4 76.6,50 76.6,55 v1(77.2,55.6) ; J23.3@78.08,77 78.08,75.4 77.68,75 72.8,75 72.4,74.6 72.4,71.75 72.95,71.2 72.95,66.614 74.164,65.4 74.2,65.4 ; R16.1@80.475,55.8 79.2,55.8 v1(79,55.6) 79,56.8 78.55,57.25 78.55,64.45 77.6,65.4 74.2,65.4
  Bottom Layer w0.2: v1(62.2,40) 64.6,37.6 66.8,37.6 v1(68,38.8) ; v1(77.2,55.6) v1(79,55.6)
SMRXD30: IC1.31 IC2.29 R9.2 | length 57.8
  Top Layer w0.2: IC1.31@48.45,17.26 52.46,17.26 53,17.8 53,28.204 70.8,46.004 v1(70.8,50.6) 70.4,51 v1(70.4,55.2) ; IC2.29@68.225,58.05 70.35,58.05 v1(70.4,58) ; v1(73,50.6) R9.2@73.875,50.6
  Bottom Layer w0.2: v1(70.4,55.2) v1(70.4,58) ; v1(70.8,50.6) v1(73,50.6)
SMRXD31: IC1.36 IC2.28 R10.2 | length 65.4
  Top Layer w0.2: IC1.36@48.45,10.91 51.91,10.91 54.2,13.2 54.2,28.414 66.436,40.65 66.45,40.65 72.2,46.4 72.2,54.6 ; IC2.28@68.225,57.55 69.65,57.55 69.85,57.35 70.75,57.35 71.131,57.731 71.6,58.2 72.119,58.2 72.45,57.869 72.45,55.85 72.2,55.6 72.2,54.6 ; R10.2@73.875,54.6 72.2,54.6
SMRXD32: IC2.27 R11.2 | length 10.8
  Top Layer w0.2: IC2.27@68.225,57.05 68.275,57 71.2,57 v1@71.8,57.6 ; v1(71.8,57.4) v1@71.8,57.6 ; v1(73.2,58.4) 74,59.2 74,61.4 74.6,62 R11.2@75.275,62
  Bottom Layer w0.2: v1(71.8,57.4) 71.8,57.6 72.6,58.4 v1(73.2,58.4)
SMRXD33: IC2.26 R12.2 | length 9.6
  Top Layer w0.2: IC2.26@68.225,56.55 71.65,56.55 v1(71.8,56.4) ; v1@73.4,56.8 v1(73.4,56.6) 73.8,56.6 75.275,58.075 R12.2@75.275,59.6
  Bottom Layer w0.2: v1(71.8,56.4) 73,56.4 73.3,56.7 v1(73.4,56.6)
SMRXDV3: IC1.33 IC2.25 R5.2 | length 59.2
  Top Layer w0.2: IC1.33@48.45,14.72 52.72,14.72 53.6,15.6 53.6,28.309 71.45,46.159 71.45,52.55 v1(71.4,52.6) 71.4,55.6 70.95,56.05 IC2.25@68.225,56.05 ; v1(73,52.6) 72.8,52.6 R5.2@73.875,52.6
  Bottom Layer w0.2: v1(71.4,52.6) v1(73,52.6)
SMTXD33: IC2.17 R38.1 | length 12
  Top Layer w0.2: R38.1@58.2,46.325 58.2,48 59,48.8 59,50.624 59.476,51.1 59.5,51.1 59.95,51.55 59.95,51.669 60.481,52.2 v1(60.6,52.2) ; IC2.17@63.25,54.575 63.25,52.75 v1(63.4,52.6)
  Bottom Layer w0.2: v1(60.6,52.2) 61,52.6 v1(63.4,52.6)
SPIQ: IC2.38 R7.2 | length 12.6
  Top Layer w0.2: IC2.38@66.25,63.025 66.25,63.9 66.95,64.6 68.6,64.6 68.8,64.8 68.8,72.2 68.275,72.725 R7.2@67.6,72.725
T_RX1_N: J3.2 J18.4 T1.9 | length 31.2
  Top Layer w0.4: J18.4@24.4,70.02 28.965,70.02 29.59,70.645 T1.9@30.69,70.645
  Bottom Layer w0.4: J3.2@7.02,58.65 7.02,57.18 7.6,56.6 8.351,56.6 12.751,61 14.101,61 22.151,69.05 23.43,69.05 J18.4@24.4,70.02
T_RX1_P: J3.1 J18.3 T1.11 | length 31.9
  Top Layer w0.4: J18.3@24.4,67.48 25.025,68.105 T1.11@30.69,68.105
  Bottom Layer w0.4: J3.1@5.24,57.63 6.87,56 8.6,56 13,60.4 14.35,60.4 22.4,68.45 23.43,68.45 J18.3@24.4,67.48
T_RX2_N: J6.2 J19.4 T2.9 | length 29.4
  Top Layer w0.4: J19.4@24.4,45.62 25.225,46.445 T2.9@30.69,46.445
  Bottom Layer w0.4: J6.2@7.02,39.45 7.02,37.78 7.6,37.2 8.351,37.2 15.801,44.65 23.43,44.65 J19.4@24.4,45.62
T_RX2_P: J6.1 J19.3 T2.11 | length 30.1
  Top Layer w0.4: J19.3@24.4,43.08 24.48,43 26,43 26.905,43.905 T2.11@30.69,43.905
  Bottom Layer w0.4: J6.1@5.24,38.43 7.07,36.6 8.6,36.6 16.05,44.05 23.43,44.05 J19.3@24.4,43.08
T_TX1_N: J3.6 J18.2 T1.14 | length 29.8
  Top Layer w0.4: J3.6@7.02,62.73 7.07,62.73 11.2,58.6 19.8,58.6 21.2,60 21.2,62.649 23.491,64.94 J18.2@24.4,64.94 25.045,64.295 T1.14@30.69,64.295
T_TX1_P: J3.3 J18.1 T1.16 | length 30.3
  Top Layer w0.4: J3.3@5.24,59.67 9.281,59.67 10.951,58 20.049,58 21.8,59.751 21.8,62.4 22.4,63 23.8,63 J18.1@24.4,62.4 28.945,62.4 29.59,61.755 T1.16@30.69,61.755
T_TX2_N: J6.6 J19.2 T2.14 | length 25.9
  Top Layer w0.4: J6.6@7.02,43.53 10.98,39.57 23.43,39.57 J19.2@24.4,40.54 24.845,40.095 T2.14@30.69,40.095
T_TX2_P: J6.3 J19.1 T2.16 | length 26.7
  Top Layer w0.4: J6.3@5.24,40.47 7.18,40.47 7.2,40.45 7.49,40.45 8.97,38.97 23.43,38.97 J19.1@24.4,38 24.845,37.555 T2.16@30.69,37.555
TX1_N: IC2.3 R25.2 T1.3 | length 25.6
  Top Layer w0.2: R25.2@51.675,63 51,62.325 51,62 51.6,61.4 55.366,61.4 56.216,60.55 59.025,60.55 IC2.3@59.775,60.55
  Top Layer w0.4: T1.3@39.71,64.295 41.246,64.295 43.151,66.2 49.949,66.2 51.1,65.049 51.1,64.25 51.675,63.675 R25.2@51.675,63
TX1_P: IC2.4 R24.2 T1.1 | length 26.6
  Top Layer w0.2: R24.2@49.925,63 50.6,62.325 50.6,61.834 51.434,61 55.2,61 56.05,60.15 58.971,60.15 59.071,60.05 IC2.4@59.775,60.05
  Top Layer w0.4: T1.1@40.065,61.8 41,61.8 41.6,62.4 41.6,63.8 43.4,65.6 49.7,65.6 50.5,64.8 50.5,64.25 49.925,63.675 R24.2@49.925,63
TX2_N: IC2.11 R39.2 T2.3 | length 31.5
  Top Layer w0.2: R39.2@55.525,51.8 56.2,52.475 56.2,55.566 57.184,56.55 IC2.11@59.775,56.55
  Top Layer w0.4: T2.3@39.71,40.095 40.81,40.095 41.505,39.4 46.1,39.4 56.1,49.4 56.1,50.55 55.525,51.125 R39.2@55.525,51.8
TX2_P: IC2.12 R37.2 T2.1 | length 32
  Top Layer w0.2: R37.2@57.275,51.8 56.6,52.475 56.6,55.4 57.25,56.05 IC2.12@59.775,56.05
  Top Layer w0.4: T2.1@39.71,37.555 40.81,37.555 42.055,38.8 46.349,38.8 56.7,49.151 56.7,50.55 57.275,51.125 R37.2@57.275,51.8
VCC: C32.1 C33.1 C34.1 C41.2 C43.+ C44.+ D2.1 D3.1 IC3.3 IC4.1 J9.1 J9.2 J11.1 J11.4 J11.7 J11.10 J12.3 J13.3 J14.3 J15.3 J16.3 J17.3 J21.1 J22.1 R54.2 | length 316.1
  Top Layer w0.4: D2.1@14.8,24.8 17.2,22.4 R54.2@20.2,22.4 ; IC4.1@30.2,27.15 32.05,27.15 34,25.2 C41.2@35.675,25.2 35.675,25.42 D3.1@37.455,27.2
  Top Layer w1: J9.2@6.84,12.94 J9.1@6.84,18.02 9.38,18.02 10.6,16.8 15,16.8 14.8,17 D2.1@14.8,24.8 15.6,25.6 28.65,25.6 IC4.1@30.2,27.15 ; C33.1@16.4,16.8 18.325,16.8 C34.1@18.8,16.325 ; C44.+@75.1,67.8 75.1,69.8 ; C43.+@75.1,71.6 75.1,69.8 ; v1(82.2,69) 80,69 79.2,69.8 75.1,69.8 ; J12.3@86.2,12.92 92.74,12.92 J11.1@93.6,12.06 ; J13.3@86.2,21.12 87.42,21.12 J11.4@93.6,27.3 ; J14.3@86.2,29.32 89.12,29.32 91,31.2 91,33.2 92.8,35 v1(93.6,35) ; J21.1@86.2,64.6 87.2,65.6 89.2,65.6 ; J22.1@86.2,70.2 88,70.2 89.2,69 89.2,65.6 ; v1(88.6,45.8) 93,50.2 v1(93.6,50.2) ; v1(88.8,37.6) 93.6,42.4 J11.7@93.6,42.54 ; v1(88.8,54) 89.82,54 J11.10@93.6,57.78 95.18,57.78 96.4,59 96.4,64.2 95,65.6 89.2,65.6
  Bottom Layer w1: v1(82.2,69) 82.2,67.4 85,64.6 J21.1@86.2,64.6 ; J15.3@86.2,37.52 88.72,37.52 v1(88.8,37.6) ; J16.3@86.2,45.72 88.52,45.72 v1(88.6,45.8) ; J17.3@86.2,53.92 88.72,53.92 v1(88.8,54) ; v1(93.6,35) 96.8,35 97,34.8 ; v1(93.6,50.2) 97,50.2
  Bottom Layer w3: 85.14,3.6 J11.1@93.6,12.06 97,15.46 97,27.4 ; J11.4@93.6,27.3 96.9,27.3 97,27.4 ; J11.7@93.6,42.54 96.74,42.54 97,42.8 ; J11.10@93.6,57.78 96.78,57.78 97,58 97,50.2 97,42.8 ; 97,27.4 97,34.8 97,42.8
  Bottom Layer w4: J9.2@6.84,12.94 16.18,3.6 85.14,3.6
pads on no net: IC1.4 IC1.5 IC1.7 IC1.17 IC1.18 IC1.19 IC1.20 IC1.21 IC1.22 IC1.27 IC1.28 IC1.32 IC2.13 IC2.18 IC2.24 IC2.30 IC2.33 IC2.34 IC3.1 IC3.7 IC5.11 IC5.12 J3.0 J6.0 T1.4 T1.5 T1.12 T1.13 T2.4 T2.5 T2.12 T2.13

## Polygon pours and split planes (outlines as drawn)
VCC on Top Layer "NONET_L-01_P-001" (solid, pour order 4): 8.2,15.6 8,15.8 8,19 8.2,19.2 21.4,19.2 21.8,18.8 21.8,16.4 20.2,16.4 19.4,15.6
NetC30_2 on Top Layer "NONET_L-01_P-001" (solid, pour order 0): 21.8,9 22,8.8 24.4,8.8 24.6,9 24.6,13 26.4,14.8 26.4,16 26.2,16.2 22,16.2 21.8,16
GND on Top Layer "NONET_L-01_P-001" (solid, pour order 2): 11.8,11.2 11.6,11.4 11.6,15.2 11.8,15.4 19.4,15.4 20.2,16.2 21.4,16.2 21.6,16 21.6,14 21.4,13.8 18.8,13.8 18.6,13.6 18.6,11.4 18.4,11.2
NetC35_1 on Top Layer "NONET_L-01_P-001" (solid, pour order 8): 18.8,13.4 19,13.6 21.4,13.6 21.6,13.4 21.6,2.2 21.4,2 15,2 14.8,2.2 14.8,10.6 15,10.8 18.4,10.8 18.8,11.2
GND on Bottom Layer "NONET_L-01_P-001" (solid, pour order 10): 8.8,26.4 24.2,11 81.6,11 83.6,13 83.6,78.8 83,79.4 38.2,79.4 37,78.2 37,36.2 31.8,31 5.6,31 5.2,30.6 5.2,26.8 5.6,26.4
GND on Bottom Layer "NONET_L-01_P-001" (solid, pour order 6): 11.6,11.4 12,11 16.2,11 16.2,11.6 12,15.8 11.6,15.8
GND on Bottom Layer "NONET_L-01_P-001" (solid, pour order 14): 5.8,31 3.4,31 3.2,30.8 3.2,20.4 3.6,20 8.4,20 9.2,20.8 9.2,21.8 10,22.6 14.2,22.6
VCC on Bottom Layer "NONET_L-01_P-001" (solid, pour order 16): 7.4,19.2 10.8,15.8 10.8,11.4 10.2,10.8 3.4,10.8 3.2,11 3.2,19 3.4,19.2

## Silkscreen, mask and mechanical layers (free items; w line width, h text height)
Top Overlay:
  circle w0.254: c5,5 r4
  circle w0.254: c95,5 r4
  circle w0.254: c95,75 r4
  circle w0.254: c5,75 r4
  lines w0.15: 19.2,66.8 19.2,66.2 ; 20.2,46.8 20.2,46.2 ; 20.6,80 20.6,72.8 ; 27.2,22.8 27.6,22.4 ; 28,80 28,72.8 26,72.8 20.6,72.8 ; 30.4,24 28.2,24 27.6,23.4 27.6,22.4 ; 39,80 39,71.2 45.4,71.2 45.4,80 ; 43.2,49 23,49 21,47 20.2,46.2 ; 45.4,79.6 61.4,79.6 62,79 ; 61.4,79 62,79 ; 19.2,66.2 20.6,67.6 20.6,72.8 ; 19.2,66.2 19.8,66.2 19.2,66.2 ; 20.2,46.2 20.8,46.2 20.2,46.2 ; 27.6,22.4 27.6,22.4 ; 27.6,22.4 28,22.8 27.6,22.4 ; 62,79 62,79.6 62,79 ; 30.4,21 34,21 34,25.4 30.4,25.4 30.4,21 ; 43.2,42.4 43.6,42.4 50.2,42.4 50.2,44 50.2,49.6 43.4,49.6 43.2,49.6 43.2,42.4
  lines w0.3: 0.2,20.4 2.8,20.4 ; 97.41,14.6 99.95,14.6 ; 97.41,19.68 99.95,19.68 ; 97.41,24.76 99.95,24.76 ; 97.41,29.84 99.95,29.84 ; 97.41,34.92 99.95,34.92 ; 97.41,40 99.95,40 ; 97.41,45.08 99.95,45.08 ; 97.41,50.16 99.95,50.16 ; 97.41,55.24 99.95,55.24 ; 97.41,60.32 99.95,60.32 ; 97.41,65.4 99.95,65.4
  text "1.8V" at 61.4,74.2 h1 r90
  text "I2C" at 71.4,73.2 h1 r90
  text "-" at 99.4,67.2 h2 r90
  text "D4" at 99.4,61.2 h2 r90
  text "+" at 99.4,57.2 h2 r90
  text "-" at 99.4,51.96 h2 r90
  text "D3" at 99.4,45.8 h2 r90
  text "+" at 99.4,41.96 h2 r90
  text "-" at 99.4,36.72 h2 r90
  text "Temp" at 77,32.8 h1 r90
  text "5V" at 25,32.6 h2
  text "D2" at 99.4,30.6 h2 r90
  text "GND" at 0.4,28.6 h2 r270
  text "+" at 99.4,26.72 h2 r90
  text "-" at 99.4,21.48 h2 r90
  text "VCC" at 0.4,18.2 h2 r270
  text "D1" at 99.4,16 h2 r90
  text "+" at 99.4,11.48 h2 r90
  text "PGM" at 74.6,9.8 h1
  text "I2S" at 78.2,9.8 h1
  text "3.3V" at 10.6,3.8 h2
Bottom Overlay:
  text "WLED Ethernet Board" at 49,27 h2
  text "Torben Hellige 2024" at 49,23 h2
  text "tortronik.de" at 49,19 h2
  text "Cyberlamp" at 49,15 h2
Mechanical 2:
  the board outline again, w0.2

## Dimensions
95,5 to 95,75 on Mechanical 3
100,0 to 95,5 on Mechanical 3
0,-0.254 to 5,5 on Mechanical 3
5,5 to 95,5 on Mechanical 3
100,0 to 0,0 on Mechanical 3
100,0 to 100,80 on Mechanical 3

## Text inside footprints (layer, text, board x,y; h text height)
C5: Top Overlay "+" at 70.6,53 h0.5 r90
C8: Top Overlay "+" at 51.2,60.6 h0.5 r90
C10: Top Overlay "+" at 69.8,64.6 h0.5 r270
C13: Top Overlay "+" at 55.4,66.6 h0.5 r270
C43: Top Overlay "+" at 74.6,73.2 h0.5 r180
C44: Top Overlay "+" at 74.6,69.4 h0.5 r180